# EAGLE board mp28164-buck-boost-flashlight-driver-tester-mk-1.0.1.opamp.only (EAGLE 9.2.2)
VERSION: v1.0
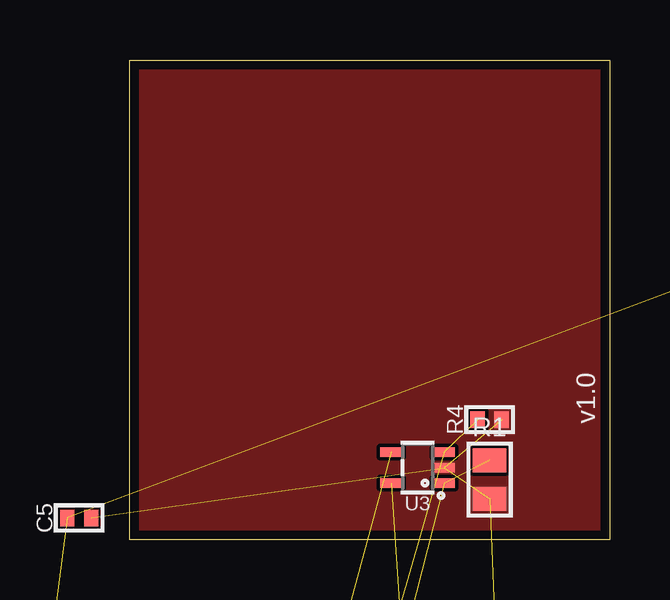
[diagram p0: board, top side]
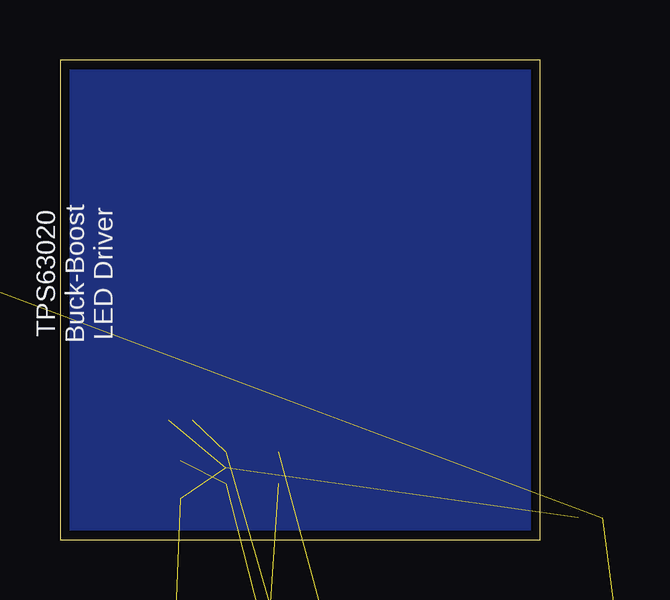
[diagram p1: board, bottom side, seen from below]

Size 20 x 20 mm. Coordinates in mm from the lower left corner, seen from the top.
Outline: 0,20 20,20 20,0 0,0 0,20
Copper layers (1*16): Top 0.035559375mm / dielectric 1.6mm / Bottom 0.035559375mm
Design rules "oshpark-2layer": minimum track width 6mil, minimum drill 10mil, track to track 6mil, track to pad 6mil, pad to pad 6mil, via to via 6mil, smd to smd 0mil, copper to edge 15mil, drill to drill 6mil, minimum pad ring 5mil, minimum via ring 5mil, stop-mask expansion 2.5mil, vias tented up to drill 20mil, thermal gap 10mil

## Footprints (pad centres in the part's own frame; a part is rotated, then mirrored left to right if it is on the bottom)
BATTCON_9V = drill 1.905: + 0,0; - 0,-12.954
C0402 = smd 0.6 x 0.7: 1 -0.5,0; 2 0.5,0
LED3MM = drill 0.813 pad 1.676 octagon: A -1.27,0; K 1.27,0
R0805-TIGHTER = smd 1 x 1.4: 1 -0.8,0; 2 0.8,0
R0402 = smd 0.6 x 0.7: 1 -0.5,0; 2 0.5,0
DIL04 = drill 0.9 pad 1.6 octagon: 1 -1.27,-3.81; 2 1.27,-3.81; 3 1.27,3.81; 4 -1.27,3.81
SC70 = smd 0.4 x 0.9: 1 -0.65,-1.1; 2 0,-1.1; 3 0.65,-1.1; 4 0.65,1.1; 5 -0.65,1.1

## Placement (x,y rotation side)
BAT1  DC 6.25 AC 0  [BATTCON_9V]  22.4,-169.6 0 top  (outside the outline)
BAT2  DC 2.5 AC 0  [BATTCON_9V]  22.4,-199.9 0 top  (outside the outline)
C5  .0000000068  [C0402]  -2.1,0.9 0 top
LED1  LED3MM  [LED3MM]  -57.2,-267.6 0 top  (outside the outline)
R1  .01  [R0805-TIGHTER]  15,2.5 90 top
R2  1000000  [R0402]  -61,-267.9 0 top  (outside the outline)
R3  75000  [R0402]  -8.3,-69 0 top  (outside the outline)
R4  1000  [R0402]  15,5 0 top
R5  1000  [R0402]  29.4,13.1 180 top  (outside the outline)
R6  100000  [R0402]  -31.8,-219.5 0 top  (outside the outline)
R7  10000  [R0402]  -14.5,-68.1 0 top  (outside the outline)
R8  750000  [R0402]  -34.9,-219.5 0 top  (outside the outline)
R9  68000  [R0402]  -38,-219.5 0 top  (outside the outline)
U1  [DIL04]  -55.4,-260.7 0 top  (outside the outline)
U3  OPA333  [SC70]  12,3 90 top

## Library data of the parts
BAT1 BAT2 = a_parts; SPICEPREFIX: V
C5 = a_parts; SPICEPREFIX: C
LED1 = a_parts; SPICEMODEL: DMOD; SPICEPREFIX: D
R1-R9 = a_parts; SPICEPREFIX: R
U1 = a_parts; SPICEMODEL: VSMOD; SPICEPREFIX: S
U3 = a_parts; SPICEMODEL: OPAMP; SPICEPREFIX: X

## Nets
FB: R2.1 R7.1 R8.1 R9.2 U1.1
GND: BAT1.- BAT2.- C5.2 R1.1 R4.2 R9.1 U1.2 U3.2
LED-: LED1.K R1.2 U3.1
LOWPASS: C5.1 R5.1 R6.2
OPAMP-: R3.2 R4.1 R6.1 U3.3
OPAMP_OUT: R3.1 R7.2 U3.4
VCC: BAT1.+ U1.3 U3.5
VDD: BAT2.+ R2.2 R5.2
VOUT: LED1.A R8.2 U1.4

## Tracks (layer width: path | path; a pad name or v marks a point on that pad's centre or on a via)
FB  (4 unrouted)
GND  (7 unrouted)
  pour Top (rank 2, no thermals): 0,0 20,0 20,20 0,20
  pour Bottom (rank 2, no thermals): 20,0 0,0 0,20 20,20
LED-  (2 unrouted)
LOWPASS  (2 unrouted)
OPAMP-  (3 unrouted)
OPAMP_OUT  (2 unrouted)
VCC  (2 unrouted)
VDD  (2 unrouted)
VOUT  (2 unrouted)

## Text on the board
bPlace: TPS63020 / Buck-Boost / LED Driver